# Altium PCB PCB_II.PcbDoc
Units mil, origin at the board's own origin, x right, y up, seen from the top; angles counter-clockwise.
Board outline 1161.42 x 1358.27 mil, 2 copper layers (Top Layer, Bottom Layer); 18 components, 9 nets, 40 pads, 6 vias.
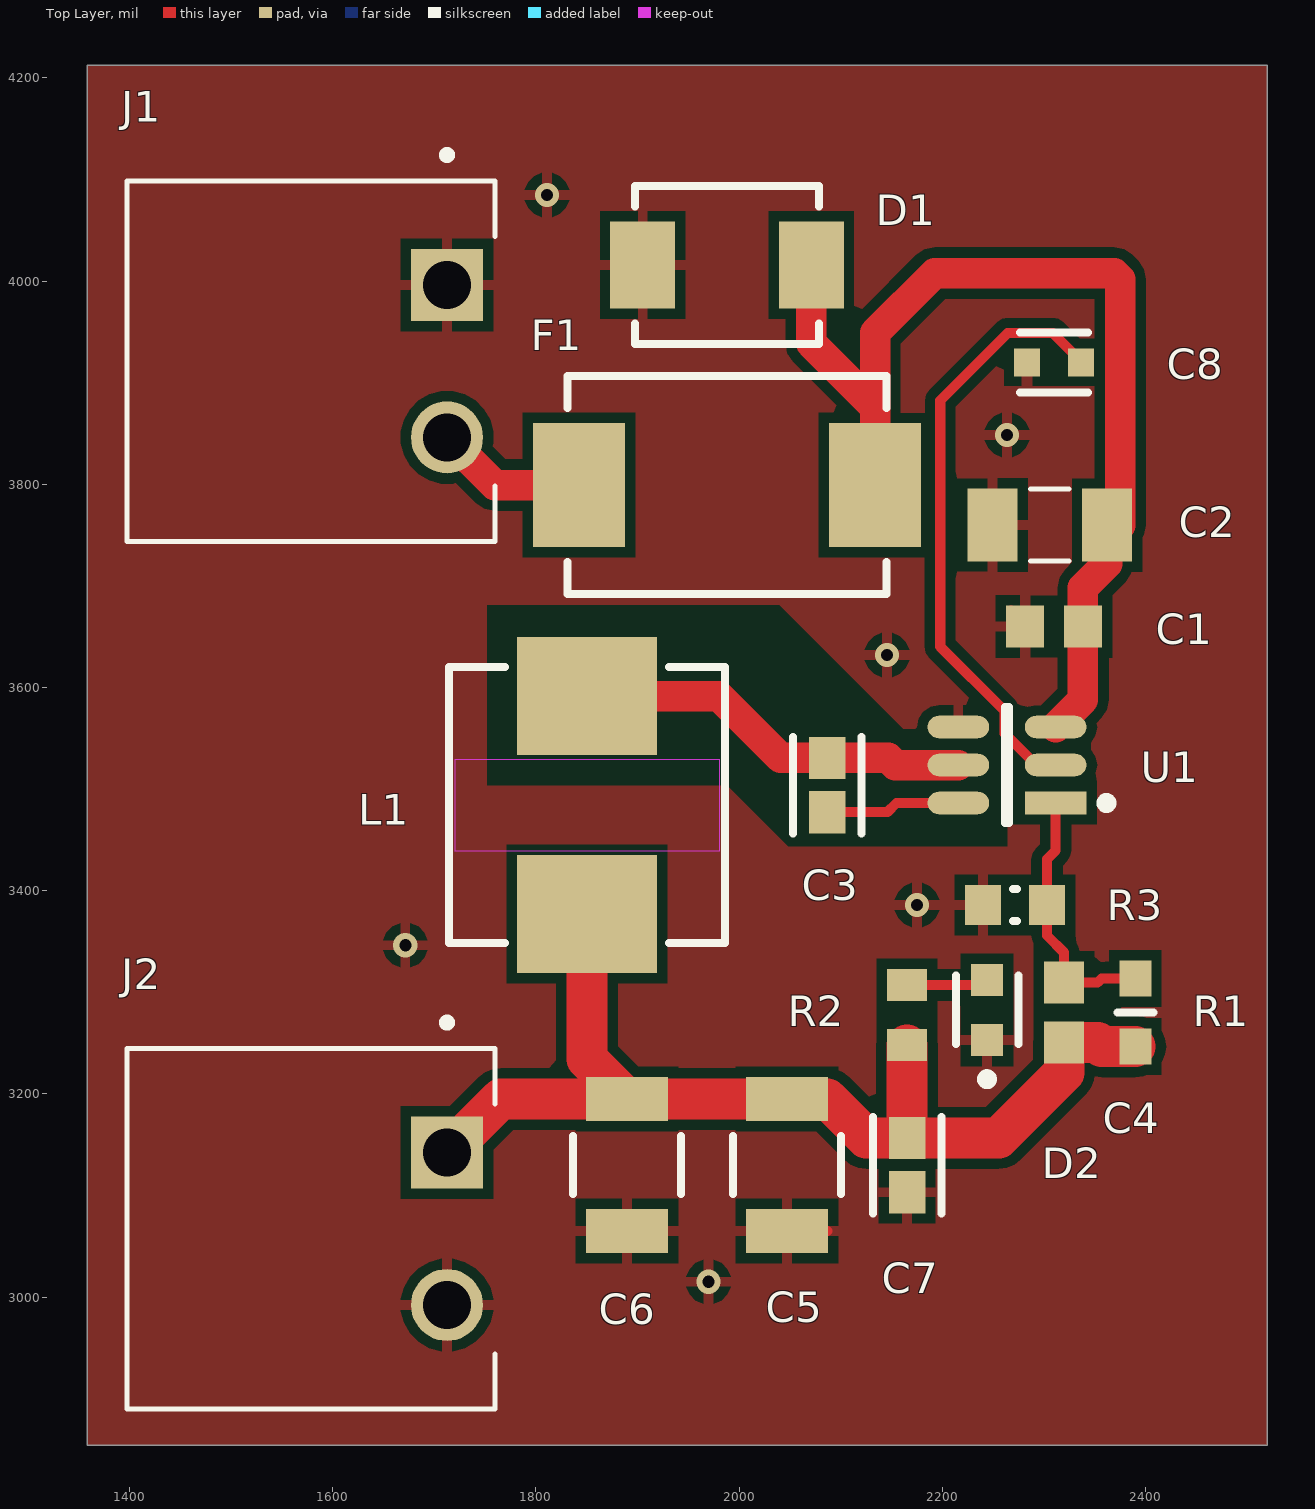
[diagram p0: Top Layer view]
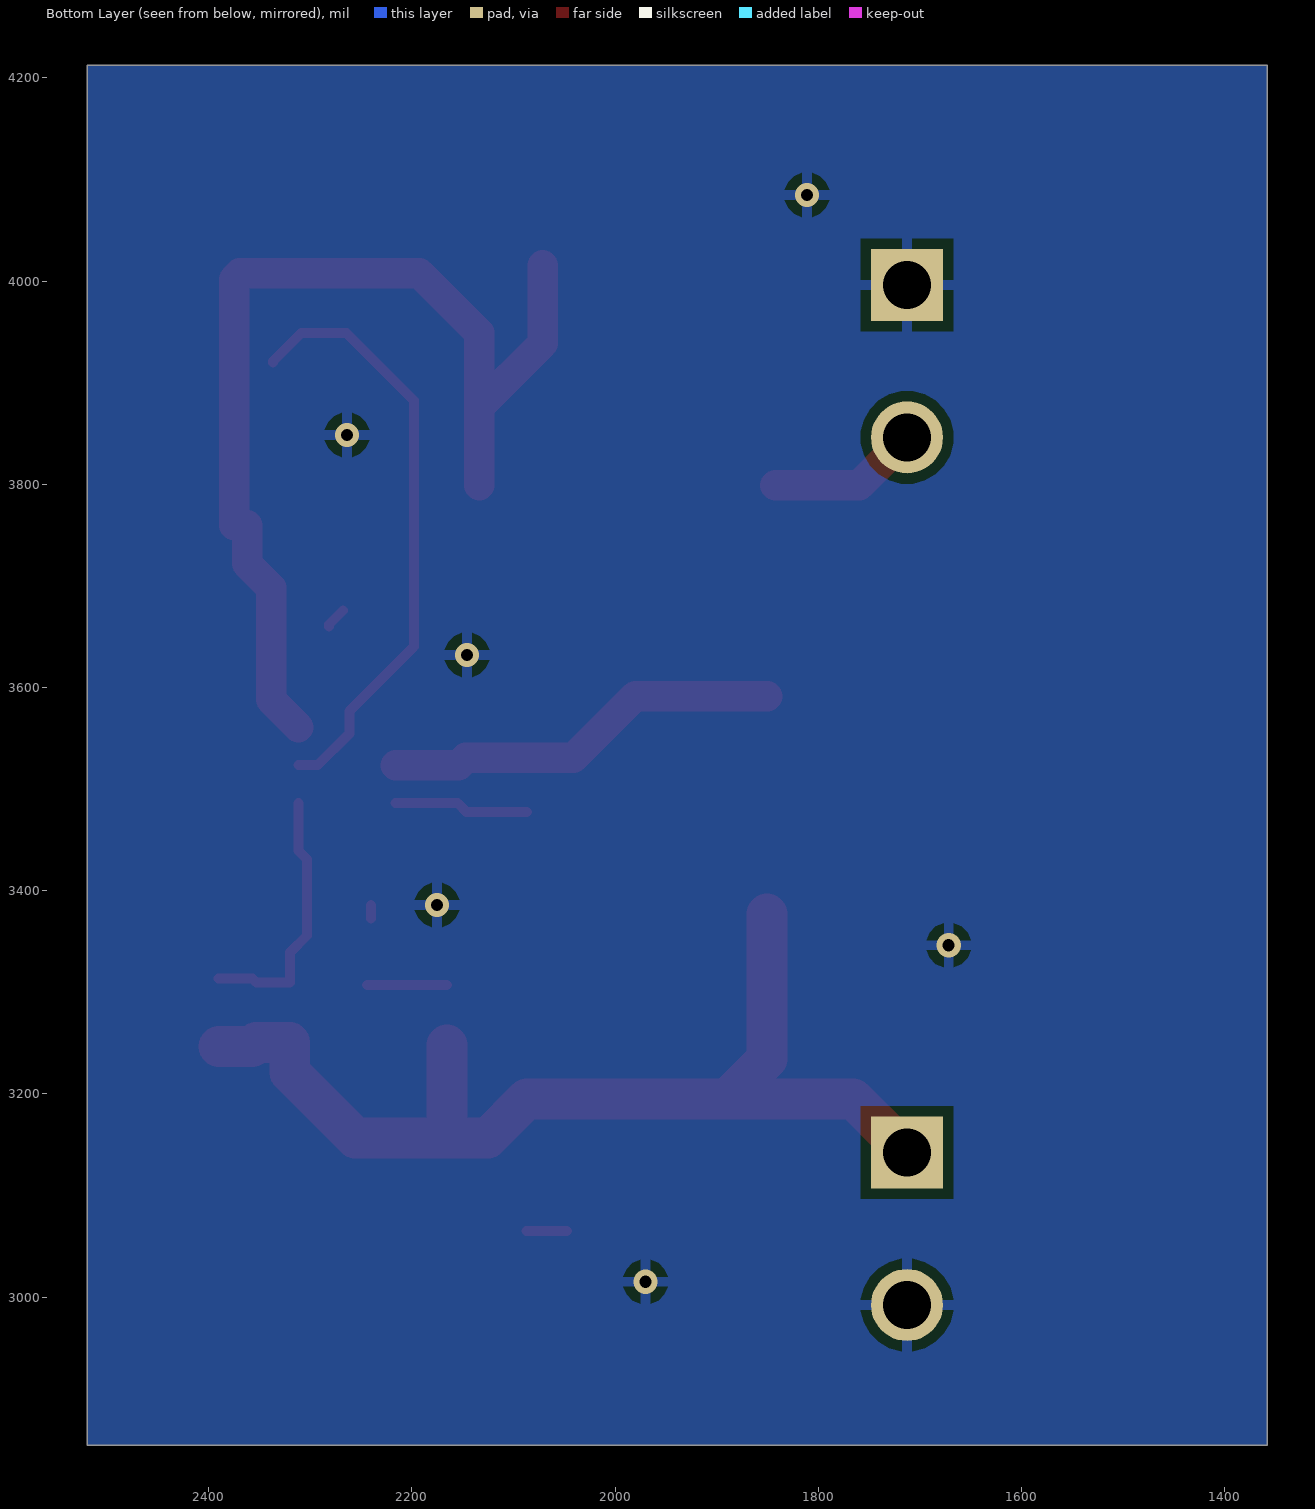
[diagram p1: Bottom Layer view, seen from below]
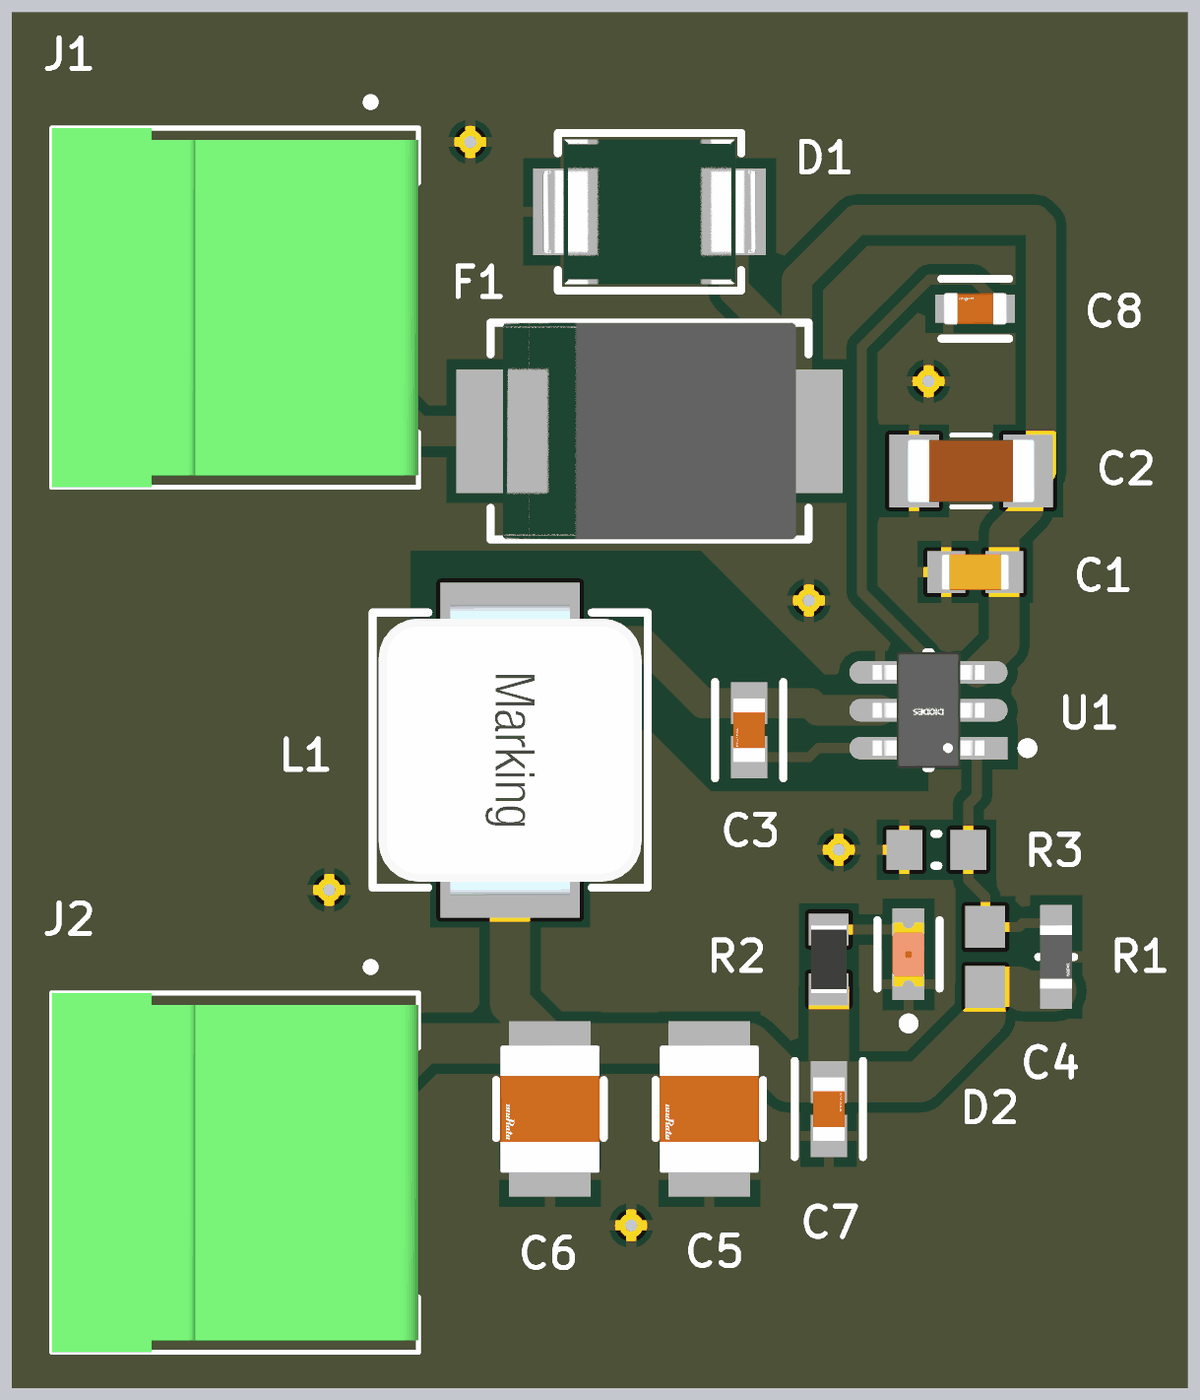
[diagram p2: 3D render of the assembled board from above, using the file's embedded part models]

## Layer stack, top to bottom
Top Solder: solder mask 0.4, Solder Resist, Dk 3.5
Top Layer: signal copper 1.4
Dielectric 1: dielectric 12.6, FR-4, Dk 4.8
Bottom Layer: signal copper 1.4
Bottom Solder: solder mask 0.4, Solder Resist, Dk 3.5

## Board outline
1358.27,4212.6 2519.68,4212.6 2519.68,2854.33 1358.27,2854.33

## Design rules (kind name [scope] priority, off if disabled: settings)
Clearance [All] p1: gap=10 ignorepadtopadclearanceinfootprint=FALSE
PolygonConnect [All] p1: connectstyle=Relief reliefconductorwidth=10 reliefentries=4 polygonreliefangle="90 Angle" airgapwidth=10
RoutingVias [All] p1: holewidth=28 width=50 viastyle="Through Hole" minholewidth=28 minwidth=50 maxholewidth=28 maxwidth=50
SolderMaskExpansion [All] p1: expansion=4 istentingtop=FALSE
SupplyNets "Schematic Supply Nets_2" [InNet('V_OUT')] p1: voltage=0.000
SupplyNets "Schematic Supply Nets_1" [InNet('24V0IN')] p2: voltage=0.000
SupplyNets "Schematic Supply Nets" [InNet('GND')] p3: voltage=0.000
Width Width_SWITCH [InNetClass('SWITCH')] p1: maxlimit=80 minlimit=12 preferedwidth=30 minimp=50.000000 maximp=50.000000 favimp=50.000000
Width Width_PWR_OUT [InNetClass('PWR_OUT')] p2: maxlimit=80 minlimit=20 preferedwidth=40 minimp=50.000000 maximp=50.000000 favimp=50.000000
Width Width_PWR_IN [InNetClass('PWR_IN')] p3: maxlimit=60 minlimit=20 preferedwidth=30 minimp=50.000000 maximp=50.000000 favimp=50.000000
Width [All] p4: maxlimit=80 minlimit=8 preferedwidth=10 minimp=50.000000 maximp=50.000000 favimp=50.000000
30 further rules are at their usual default settings.

## Classes and differential pairs
net class SWITCH: U_SW
net class PWR_OUT: V_OUT
net class PWR_IN: 24V0IN U_VIN

## Components (designator, comment, footprint, x,y, rotation, side; value= is the part's Value field where it differs from the comment)
C1 "GRM188R71H104KA93D" CAPC1608X90X35ML10T15 2310,3660 r0 top
C2 "GRM31CR71E106KA12L" CAPC3216X180N 2305.91,3759.84 r0 top value=10µF
C3 "UMK107B7104KAHT" FP-0603-L_1_6_0_1-W_0_8_0-IPC_B 2086.61,3503.94 r90 top
C4 "06035A560FAT2A" CAPC1608X90X35NL15T15 2320,3280 r270 top
C5 "GRM32ER71E226KE15L" FP-GRM32E-0_3-0_2-MFG 2047.24,3129.92 r270 top
C6 "GRM32ER71E226KE15L" FP-GRM32E-0_3-0_2-MFG 1889.76,3129.92 r270 top
C7 "UMK107B7104KAHT" FP-0603-L_1_6_0_1-W_0_8_0-IPC_B 2165.35,3129.92 r270 top
C8 "GRM188R72A223KAC4J" FP-GRM188-0_1-e0_2_0_5-MFG 2310,3920 r180 top
D1 "SMBJ33CA-TR" FP-SMB-CA-MFG 1988.19,4015.75 r180 top
D2 "LTST-C191KRKT" FP-LTST-C191KRKT-MFG 2244.09,3282.56 r90 top
F1 "MF-SM100-2" FP-MF-SM100-2-MFG 1988.19,3799.21 r0 top value=0.12-0.48Ω
J1 "1803277" PHOENIX_1803277 1397.64,4098.43 r270 top
J2 "1803277" PHOENIX_1803277 1397.64,3244.49 r270 top
L1 "744373460068" WE-LHMI_7030 1850.39,3484.25 r270 top
R1 "RC0603FR-07158KL" FP-RC0603-0_55-MFG 2390,3280 r270 top
R2 "Resistor 1k +/-1% 0603 100 mW" RESC1608X55X25ML10T15 2165.35,3277.56 r270 top value=1k
R3 "30K1 1% 0603(1608)" RESC0603(1608)_N 2271.65,3385.83 r0 top value="30100.00 Ohm"
U1 "AP63300WU-7" FP-TSOT26-IPC_A 2263.78,3523.62 r180 top

## Footprints (in the part's own frame and the unit in brackets; to place one, negate y for a bottom-side part, rotate by r counter-clockwise, add the part's x,y. Pads: shape width x height; smd on the part's side, far side on the other; paste and mask are expansions set on the pad)
CAPC1608X90X35ML10T15 [mm] "Chip Capacitor, 2-Leads, Body 1.7x0.9mm, IPC Low Density"
  rect 0.95x1.05 smd: 1(-0.725,0) 2(0.725,0)
  body extent -0.85,-0.45 0.85,0.45, height 0.9
CAPC1608X90X35NL15T15 [mm] "Chip Capacitor, 2-Leads, Body 1.60x0.81mm, IPC Medium Density"
  rect 1.05x1 smd: 1(-0.75,0) 2(0.75,0)
  body extent -0.88,-0.48 0.87,0.48, height 0.9
CAPC3216X180N [mm]
  rect 1.25x1.82 smd: 1(-1.43,0) 2(1.43,0)
  silkscreen extent -0.48,-0.9 0.48,0.9, body extent -1.6,-0.8 1.6,0.8, height 1.8
FP-0603-L_1_6_0_1-W_0_8_0-IPC_B [mil]
  rect 41.64x35.91 smd paste+0 mask+0: 1(-26.66,0) 2(26.66,0)
  silkscreen extent -47,-34 47,34, body extent -57,-28 57,28, height 10
FP-GRM32E-0_3-0_2-MFG [mm]
  rect 1.1x2.05 smd paste+0 mask+0: 1(-1.65,0) 2(1.65,0)
  silkscreen extent -0.72,-1.35 0.72,1.35, body extent -2.3,-1.45 2.3,1.45, height 0.25
FP-GRM188-0_1-e0_2_0_5-MFG [mm]
  rect 0.65x0.7 smd paste+0 mask+0: 1(-0.675,0) 2(0.675,0)
  silkscreen extent -0.85,-0.75 0.85,0.75, body extent -1.1,-0.55 1.1,0.55, height 0.25
FP-LTST-C191KRKT-MFG [mm]
  rect 0.8x0.8 smd paste+0 mask+0: 1(-0.75,0) 2(0.75,0)
  silkscreen extent -1.86,-0.78 0.86,0.78, body extent -1.25,-0.55 1.25,0.55, height 0.25
FP-MF-SM100-2-MFG [mm]
  rect 2.3x3.1 smd paste+0 mask+0: 1(-3.7,0) 2(3.7,0)
  silkscreen extent -3.99,-2.72 3.99,2.72, body extent -4.95,-2.82 4.95,2.82, height 0.25
FP-RC0603-0_55-MFG [mm]
  rect 0.9x0.8 smd paste+0 mask+0: 1(-0.85,0) 2(0.85,0)
  silkscreen extent 0,-0.45 0,0.45, body extent -1.4,-0.55 1.4,0.55, height 0.25
FP-SMB-CA-MFG [mm]
  rect 1.62x2.18 smd paste+0 mask+0: 1(-2.11,0) 2(2.11,0)
  silkscreen extent -2.3,-1.98 2.3,1.98, body extent -3.02,-2.07 3.02,2.07, height 0.25
FP-TSOT26-IPC_A [mm]
  rect 1.54x0.566 smd paste+0 mask+0: 1(-1.216,0.95)
  rrect100% 1.54x0.566 smd paste+0 mask+0: 2(-1.216,0) 3(-1.216,-0.95) 4(1.215,-0.95) 5(1.215,0) 6(1.215,0.95)
  silkscreen extent -2.61,-1.45 0.05,1.45, body extent -2.49,-1.95 2.49,1.95, height 0.25
PHOENIX_1803277 [mm]
  rect 1.8x1.8 / inner round 1.8 / far side rect 1.8x1.8 hole 1.2: 01(2.6,8)
  round 1.8 hole 1.2: 02(6.41,8)
  silkscreen extent -0.75,0 9.01,9.2, body extent 0,0 9.01,9.2, height 7.4
RESC0603(1608)_N [mm] "Chip Resistor, Body 1.6x0.8mm, IPC Medium Density"
  rect 0.9x1 smd: 1(-0.8,0) 2(0.8,0)
  silkscreen extent -0.05,-0.4 0.05,0.4, body extent -0.85,-0.47 0.85,0.47, height 0.6
RESC1608X55X25ML10T15 [mm] "Chip Resistor, 2-Leads, Body 1.70x0.90mm, IPC Low Density"
  rect 0.8x1 smd: 1(-0.75,0) 2(0.75,0)
  body extent -0.85,-0.45 0.85,0.45, height 0.55
WE-LHMI_7030 [mm] "SMT Power Inductor, 2-Leads, body 6.6x6.6mm"
  rect 2.95x3.5 smd: 1(-2.725,0) 2(2.725,0)
  Top Layer keep-out region: -1.15,3.3 1.15,3.3 1.15,-3.3 -1.15,-3.3
  silkscreen extent -3.45,-3.45 3.45,3.45, body extent -3.65,-3.3 3.65,3.3, height 2.8

## Part data
C1: library part CMP-2100-03643-1, "Chip Capacitor, 0.1 uF, +/- 10%, 50 V, -55 to 125 degC, 0603 (1608 Metric), RoHS, Tape and Reel", Capacitance=100nF, Case Code (Imperial)=0603, Case Code (Metric)=1608, Dielectric=X7R, Dielectric Material=Ceramic, Insulation Resistance=10GR, Manufacturer=Murata, Max Operating Temperature=125degC, Min Operating Temperature=-55degC, Package Description="2-Pin Surface Mount Device, Body 1.6 x 0.8 mm", Package Quantity=1, Tolerance=10%, Voltage=50V, Case/Package=0603, Contact Plating=Tin, Datasheet URL=http://psearch.en.murata.com/capacitor/product/GRM188R71H104KA93%23.pdf, Datasheet Version=42675.0, Depth=0.8mm, Height=0.8mm, Lead Free=LeadFree, Length=1.6mm, Manufacturer URL=http://www.murata.com/, Material=Ceramic, Mount=SurfaceMount, Number of Pins=2, Package Reference=0603, Packaging=TapeandReel, Radiation Hardening=No, REACH SVHC=NoSVHC, RoHSCompliant=true, Termination=SMD/SMT, Thickness=0.035inch, Voltage Rating=50V, Voltage Rating (DC)=50V, Width=0.8mm
C2: library part CMP-001-00083-1, "SMD capacitor X7R(EIA) with capacitance 10uF Tol.10%. Rated voltage 25Vdc 125C", Case/Package="1206 Murata", Check_prices=https://www.snapeda.com/parts/GRM31CR71E106KA12L/Murata+Electronics+North+America/view-part/?ref=eda, Component Type=Standard, Design Item ID=GRM31CR71E106KA12L, MF="Murata Electronics", MP=GRM31CR71E106KA12L, Pins=2, SnapEDA_Link=https://www.snapeda.com/parts/GRM31CR71E106KA12L/Murata+Electronics+North+America/view-part/?ref=snap, Source=GRM31CR71E106KA12L.SchLib
C3 C7: library part CMP-14477-002598-2, "None", Capacitance=100nF, Case Code (Imperial)=0603, Case Code (Metric)=1608, Dielectric=X7R, Max Operating Temperature=125°C, Min Operating Temperature=-55°C, Package Quantity=4000, Ratings=AEC-Q200, Tolerance=10%, Voltage Rating=50V, Case/Package=0603, Halogen Free="Halogen Free", Height=0.8mm, Lead Free="Lead Free", Length=0.063inch, Mount="Surface Mount", Packaging="Tape and Reel", RoHS Compliant=Yes, Termination=SMD/SMT, Thickness=0.035inch, Voltage Rating (DC)=50V, Width=0.8mm
C4: library part CMP-2006-04334-1, Manufacturer="AVX Interconnect / Elco", Part Number=06035A560FAT2A
C5 C6: library part CMP-1662-00021-2, "Chip Multilayer Ceramic Capacitors for General Purpose, 1210, 22uF, X7R, 15%, 10%, 25V", Capacitance=22uF, Case Code (Imperial)=1210, Case Code (Metric)=3225, Dielectric=X7R, Max Operating Temperature=125°C, Min Operating Temperature=-55°C, Package Quantity=1, Tolerance=10%, Voltage=25V, Case/Package=1210, Depth=2.5mm, Height=2.5mm, Lead Free="Lead Free", Length=3.2mm, Material=Ceramic, Mount="Surface Mount", Number of Pins=2, Packaging="Tape and Reel", Radiation Hardening=No, REACH SVHC="No SVHC", Termination=SMD/SMT, Thickness=0.106inch, Voltage Rating=25V, Voltage Rating (DC)=25V, Width=0.098inch
C8: library part CMP-06035-008498-1, "Chip Multilayer Ceramic Capacitors for General Purpose, 0603, 22000pF, X7R, 15%, 10%, 100V", Capacitance=22nF, Case/Package=0603, Dielectric=X7R, Max Operating Temperature=125°C, Min Operating Temperature=-55°C, Package Quantity=10000, Tolerance=10%, Voltage Rating=100V, Length=0.063inch, Mount="Surface Mount", Packaging="Tape and Reel", Thickness=0.035inch, Voltage Rating (DC)=100V, Weight=0.000222oz, Width=0.031inch
D1: library part CMP-12225-000040-1, "TVS DIODE 33V 69.7V SMB", Breakdown Voltage=36.7V, Clamping Voltage=53.3V, Manufacturer=STMicroelectronics, Max Junction Temp=+150°C, Package=SMB-CA, Peak Pulse Current=11.8A, Peak Pulse Power=600W, Reverse Standoff Voltage=33V, Temperature="-55°C to +150°C", Temperature Range Low=-55°C, Automotive=No, Category=Diode, ComponentLink2Description=Datasheet, ComponentLink2URL=https://www.st.com/resource/en/datasheet/smbj.pdf, Device Class L1="Circuit Protection", Device Class L2="TVS Diodes", Device Class L3=unset, Digikey Description="TVS DIODE 33V 69.7V SMB", Direction=Bidirectional, Height=2.65mm, Lead Free=Yes, Manufacturer Part Number=SMBJ33CA-TR, Mouser Description="TVS Diodes - Transient Voltage Suppressors 600W 33V Bidirect", Number Of Channels=1, Octopart=https://octopart.com/smbj33ca-tr-stmicroelectronics-347069, RoHS=TRUE, Standoff Height=0.05mm, Temperature Range High=+150°C
D2: library part CMP-2000-05199-2, Case Code (Imperial)=0603, Case Code (Metric)=1608, Color=Red, Current=2A, Forward Current=20mA, Forward Voltage=2V, Lens Color=Colorless, Max Operating Temperature=85°C, Min Operating Temperature=-55°C, Power Dissipation=75mW, Reverse Voltage=5V, Case/Package=0603, Depth=800µm, Dominant Wavelength=631nm, Height=550µm, Illumination Color=Red, Lead Free="Lead Free", Length=1.6mm, Lens Style=Clear, Lens Transparency=Clear, Luminous Intensity=54mcd, Mount="Surface Mount", NexarPartId=549908, Number of Elements=1, Number of LEDs=1, Number of Pins=2, Packaging="Tape and Reel", Power Rating=75mW, Radiation Hardening=No, RoHS=Compliant, Schedule B="8541402000, 8541402000", Test Current=20mA, Viewing Angle=130°, Voltage=2V, Wavelength=639nm, Width=800µm
F1: library part CMP-07400-000033-1, "PTC RESET FUSE 30V 1.1A 2SMD", Ambient Temperature Range High=+85°C, Ambient Temperature Range Low=-40°C, Current Rating=80A, Hold Current=1.1A, Manufacturer=Bourns, Resistance=0.12-0.48Ω, Temperature="-40°C to +85°C", Trip Current=2.2A, Voltage Rating=30V, Automotive=Yes, Automotive Grade="Grade 3", Category=Fuse, ComponentLink2Description=Datasheet, ComponentLink2URL=https://www.bourns.com/docs/Product-Datasheets/mfsm.pdf, Device Class L1="Circuit Protection", Device Class L2="PTC Resettable Fuses", Device Class L3=unset, Digikey Description="PTC RESET FUSE 30V 1.1A 2SMD", Height=3mm, Lead Free=Yes, Manufacturer Part Number=MF-SM100-2, Mouser Description="Resettable Fuses - PPTC 30Volts 80Amps Hold 1.1A Trip 2.2A", Octopart=https://octopart.com/mf-sm100-2-bourns-125561, Package=MF-SM100-2, RoHS=TRUE, Temperature Range High=+85°C, Temperature Range Low=-40°C, Trip Time=0.5s
J1 J2: library part CMP-002-00071-1, "Pluggable Header 3.81mm 16AWG 160V 8A 2 Position COMBICON MC Series", Case/Package=None, Check_prices=https://www.snapeda.com/parts/1803277/Phoenix+Contact/view-part/?ref=eda, Component Type=Standard, Design Item ID=1803277, MF="Phoenix Contact", MP=1803277, Pins=2, SnapEDA_Link=https://www.snapeda.com/parts/1803277/Phoenix+Contact/view-part/?ref=snap, Source=1803277.SchLib
L1: library part CMP-1353-00050-5, Ambient Temperature Range High=85°C, Ambient Temperature Range Low=-40°C, Case/Package=Nonstandard, Current Rating=11A, DC Resistance (DCR)=4.8mΩ, Frequency=72MHz, Inductance=680nH, Inductance Tolerance=20%, Max Operating Temperature=125°C, Saturation Current=15.9A, Series Resistance=5.5mΩ, Test Frequency=100kHz, Composition=Wirewound, Core Material="Composite, Ferrite", Depth=6.6mm, Height=2.8mm, Height - Seated (Max)=2.9972mm, Length=7.3mm, Max DC Current=11A, Min Operating Temperature=-40°C, Mount="Surface Mount", NexarPartId=21272415, Number of Pins=2, Packaging="Tape & Reel (TR)", REACH SVHC=Unknown, RMS Current (Irms)=11A, RoHS=Compliant, Self Resonant Frequency=72MHz, Shielding=Shielded, Termination=SMD/SMT, Tolerance=20%, Width=6.6mm
R1: library part CMP-2000-04906-2, "RES 158K OHM 1% 1/10W 0603", Case Code (Imperial)=0603, Case Code (Metric)=1608, Max Operating Temperature=155°C, Max Power Dissipation=100mW, Min Operating Temperature=-55°C, Package Quantity=5000, Resistance=158kR, Resistor Type="Thick Film", Temperature Coefficient=100ppm/°C, Tolerance=1%, Voltage Rating=50V, Working Voltage=75V, Case/Package=0603, Construction=Rectangular, Depth=0.8mm, Features="Moisture Resistant", Height=0.45mm, Lead Free="Lead Free", Length=1.6mm, Military Standard=Not, Number of Terminations=2, Packaging="Tape and Reel", Power Rating=100mW, RoHS Compliant=Yes, Series=RC, Technology="THICK FILM", Termination=SMD/SMT, Voltage Rating (DC)=50V, Width=0.8mm
R2: library part CMP-009-00014-5, "Chip Resistor, 1 KOhm, +/-1%, 0.1 W, -55 to 155 degC, 0603 (1608 Metric)", Case/Package=0603, Max Operating Temperature=155°C, Min Operating Temperature=-55°C, Power=100mW, Tolerance=1%, Voltage Rating=50V, Mounting Technology=SM, Pins=2, RoHS Compliant=True
R3: library part CMP-1012-00676-1, "30K1 0.1W 1% 0603 (1608 Metric)  SMD", Case-EIA=0603, Case-Metric=1608, Power="0.1 W", Tolerance="1 %", Technology=SMT
U1: library part CMP-12757-000025-1, "DCDC CONV HV BUCK TSOT26"

## Via types
v1: diameter 24, hole 12, Top Layer to Bottom Layer, 6 vias

## Nets (pads, with @x,y where several pads share a name; then routed paths per layer and width w, separated by ;. In a path a pad name is that pad's centre, name@x,y a point inside that pad or via, vN(x,y) a via of type N, cw(c..) or ccw(c..) an arc to the next point about the centre after c; other vN are vias at no path point)
24V0IN: F1.1 J1.02 | length 149.3
  Top Layer w30: J1.02 1759.45,3799.21 F1.1
GND: C1.1 C2.1 C5.2 C6.2 C7.2 C8.2 D1.2 D2.1 J1.01 J2.02 R3.1 U1.4 | length 76.2
  Top Layer w10: v1@1968.5,3016.5 v1(1970,3015) ; C5.2 C5.2@2087,3064.96 ; R3.1@2240.16,3372.84 R3.1 ; C1.1@2267.76,3675.67 2281.46,3661.97 C1.1
  other v1: 1671.62,3346.24 2175.2,3385.83 2145.67,3631.89 2263.78,3848.43 1811.02,4084.65
LED: D2.2 R2.1 | length 78.7
  Top Layer w10: R2.1 D2.2@2244.09,3307.09
U_BST: C3.1 U1.6 | length 133
  Top Layer w10: C3.1 2146,3477.28 2154.94,3486.22 U1.6
U_EN: C8.1 U1.2 | length 595.6
  Top Layer w10: U1.2 2292.46,3523.62 2261.24,3554.85 2261.24,3576.95 2198,3640.18 2198,3882.36 2264.42,3948.78 2308.78,3948.78 2336.58,3920.98 C8.1
U_FB: C4.1 R1.1 R3.2 U1.1 | length 258.8
  Top Layer w10: U1.1 2311.63,3439.48 2303.15,3431 R3.2 2303.15,3355.85 2320,3339 C4.1 2353,3309.53 2356.94,3313.46 R1.1
U_SW: C3.2 L1.1 U1.5 | length 393.7
  Top Layer w30: L1.1 1980.06,3591.54 2041,3530.6 C3.2 2147,3530.6 2153.98,3523.62 U1.5
U_VIN: C1.2 C2.2 D1.1 F1.2 U1.3 | length 1057.9
  Top Layer w30: D1.1 2071.26,3938.6 2133.86,3876 ; F1.2 2133.86,3876 ; U1.3 2338.54,3587.93 C1.2 2338.54,3698 2362.2,3721.66 C2.2 2375,3759.84 2375,4001.86 2369.18,4007.68 2192.54,4007.68 2133.86,3949 2133.86,3876
V_OUT: C4.2 C5.1 C6.1 C7.1 J2.01 L1.2 R1.2 R2.2 | length 1062.7
  Top Layer w40: J2.01 1765.35,3194.88 C6.1 ; L1.2 1850.39,3234.25 C6.1 ; R2.2 C7.1 ; R1.2 2356.94,3246.54 2353,3250.47 C4.2 2320,3221 2255.58,3156.58 C7.1 ; C6.1 C5.1 2087,3194.88 2125.3,3156.58 C7.1

## Polygon pours and split planes (outlines as drawn)
GND on Top Layer "GND_L01_P010" (solid, pour order 10): 1358.27,4212.6 2519.68,4212.6 2519.68,2854.33 1358.27,2854.33
GND on Bottom Layer "GND_L02_P007" (solid, pour order 7): 1358.27,4212.6 2519.68,4212.6 2519.68,2854.33 1358.27,2854.33

## Other copper
Top Layer:
  pour cut-out: 1751.97,3681.1 1751.97,3503.94 1988.19,3503.94 2048.23,3443.9 2263.78,3443.9 2263.78,3533.46 2238.19,3559.05 2161.42,3559.05 2039.37,3681.1